# Altium PCB ESCV2.PcbDoc
Units mm, origin at the board's own origin, x right, y up, seen from the top; angles counter-clockwise.
Board outline 60 x 30 mm, 2 copper layers (L1, L2), stack 1.671 mm thick; 69 components, 45 nets, 192 pads, 35 vias.
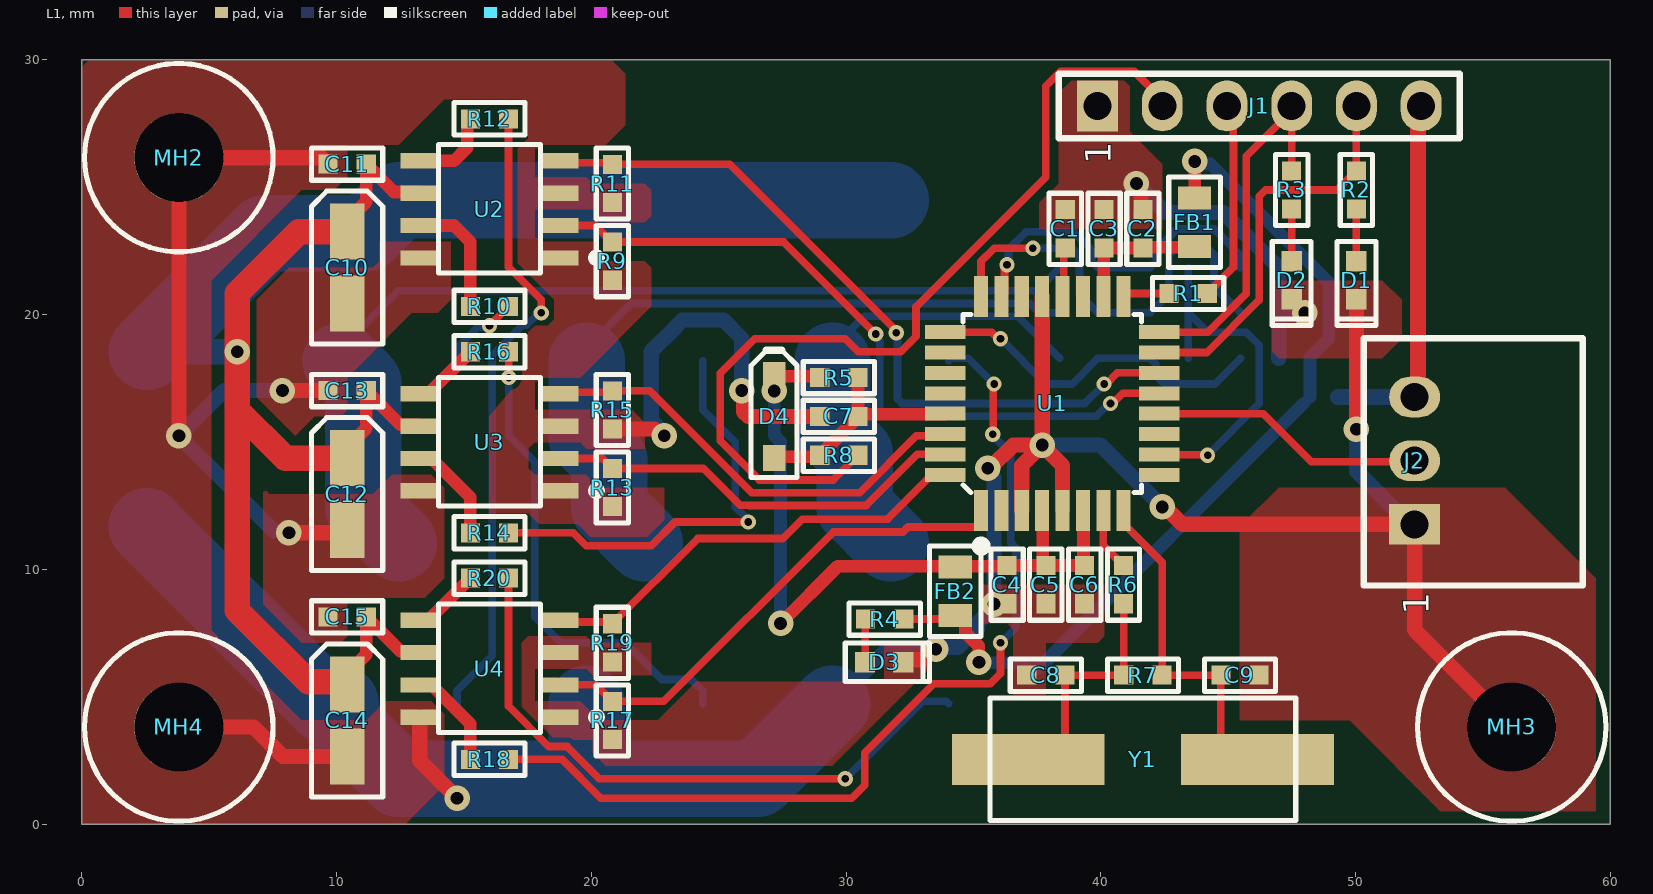
[diagram p0: L1 view]
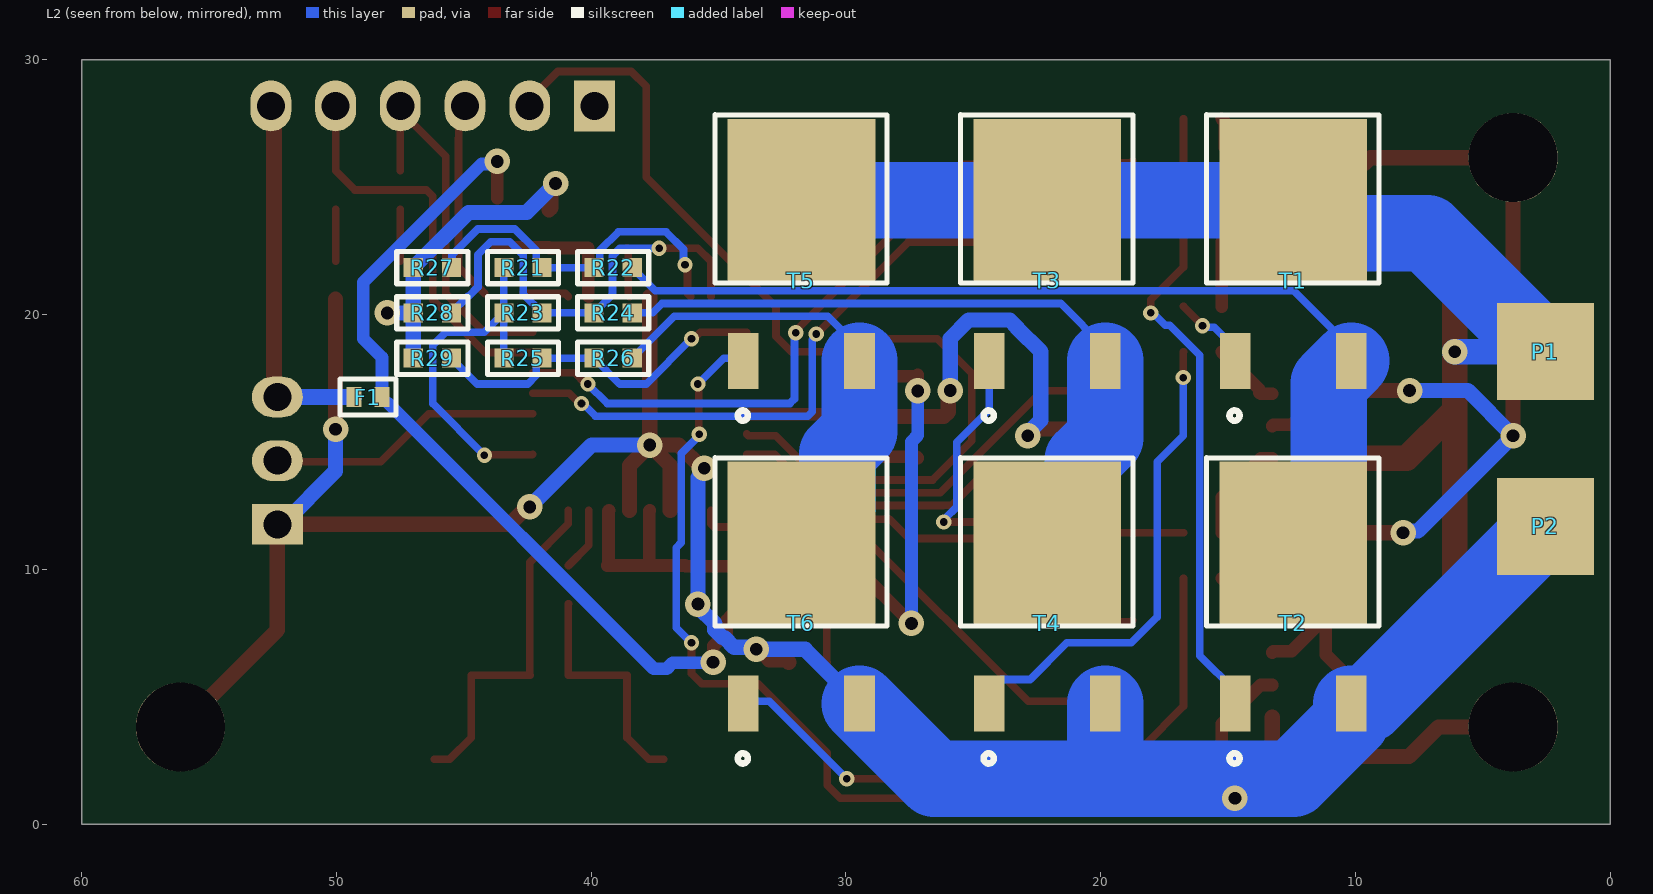
[diagram p1: L2 view, seen from below]
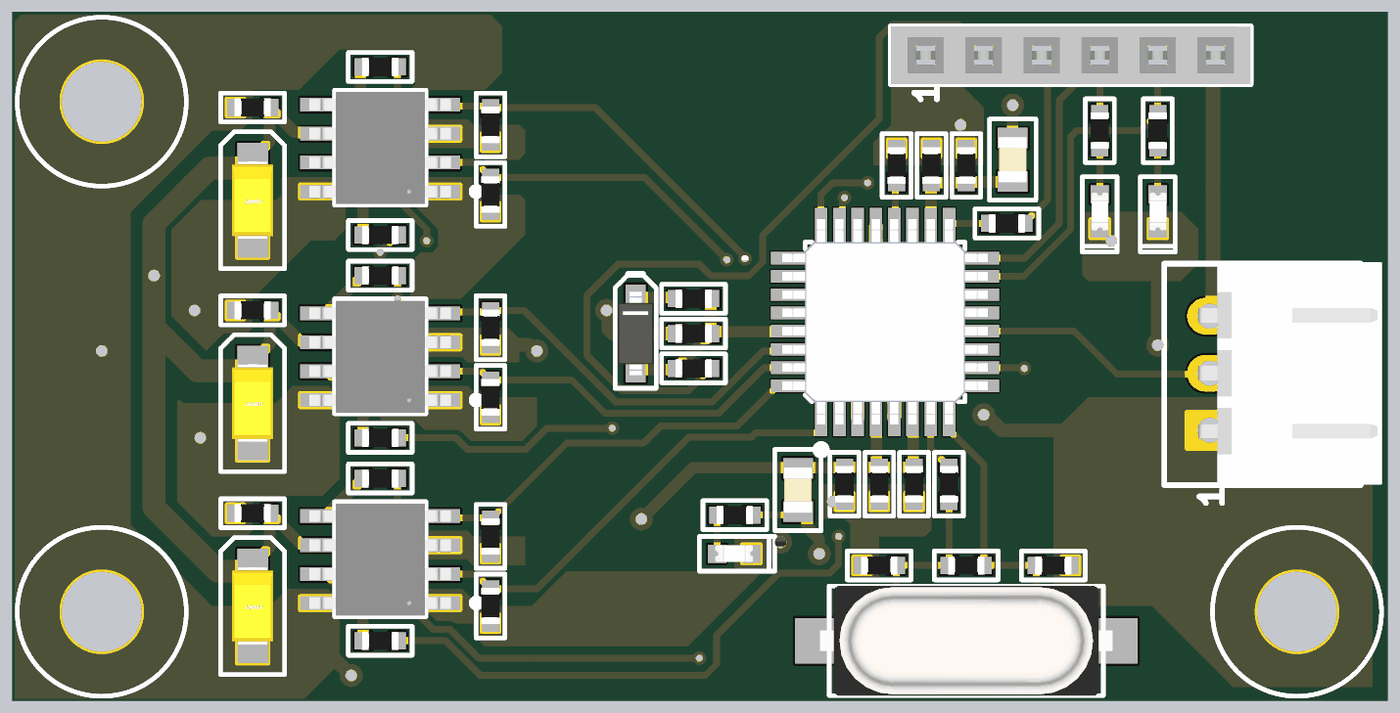
[diagram p2: 3D render of the assembled board from above, using the file's embedded part models]
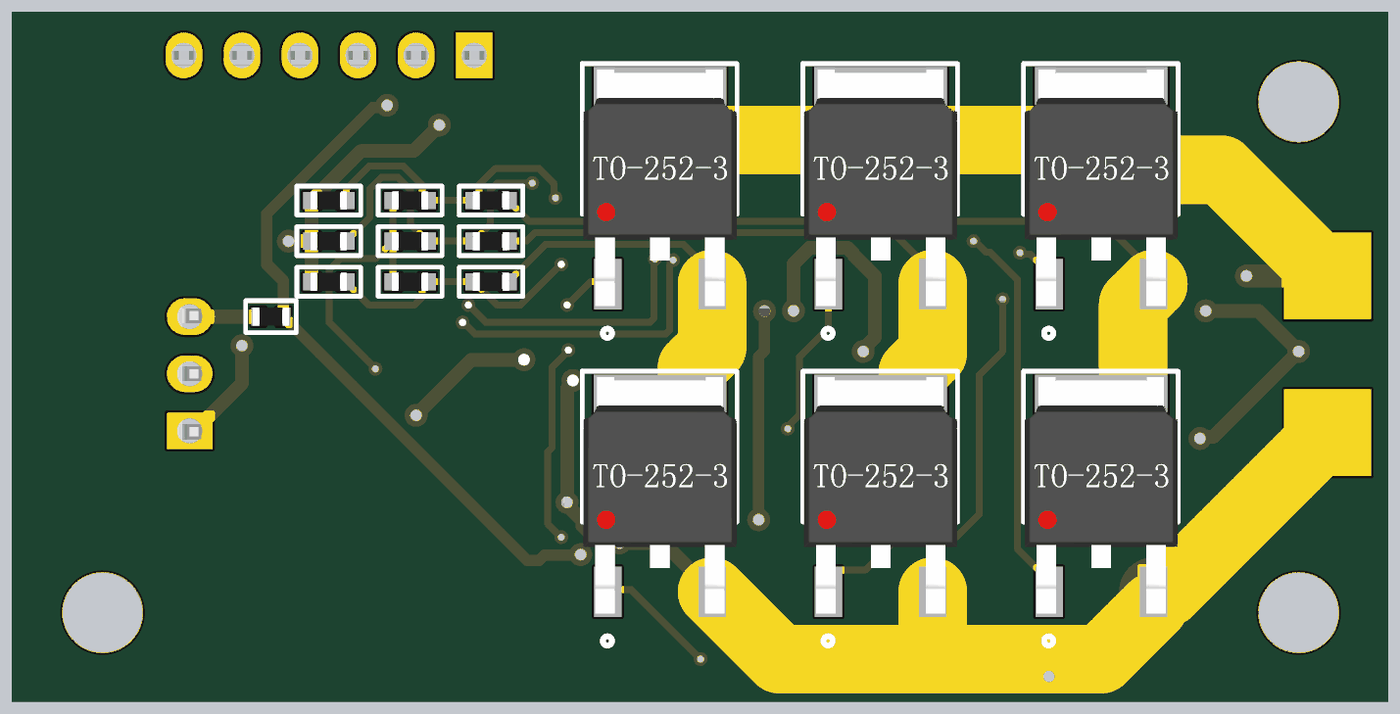
[diagram p3: 3D render of the assembled board from below, using the file's embedded part models]

## Layer stack, top to bottom
Top Solder: solder mask 0.0102, Solder Resist, Dk 3.5
L1: signal copper 0.0356
Dielectric 1: dielectric 1.6, FR-4, Dk 4.8
L2: signal copper 0.0356
Bottom Solder: solder mask 0.0102, Solder Resist, Dk 3.5

## Board outline
0,0 0,30 60,30 60,0

## Design rules (kind name [scope] priority, off if disabled: settings)
Clearance [All] p1: gap=0.2 ignorepadtopadclearanceinfootprint=FALSE
ComponentClearance [All] p1: gap=0.2 collisioncheckmode=3 verticalgap=0.2 showdistances=FALSE
HoleSize [All] p1: absolutevalues=TRUE maxlimit=10 minlimit=0.2 maxpercent=80.000 minpercent=20.000
HoleToHoleClearance [All] p1: gap=0.3 allowstackedmicrovias=TRUE
MinimumSolderMaskSliver [All] p1: minsoldermaskwidth=0.1
PolygonConnect [All] p1: connectstyle=Direct reliefconductorwidth=0.254 reliefentries=4 polygonreliefangle="90 Angle" airgapwidth=0.254
RoutingVias [All] p1: holewidth=0.3 width=0.6 viastyle="Through Hole" minholewidth=0.3 minwidth=0.6 maxholewidth=0.5 maxwidth=1
SilkToSilkClearance [All] p1: silktosilkclearance=0.1
SilkToSolderMaskClearance [IsPad] p1: minsilkscreentomaskgap=0 clearancetoexposedcopper=TRUE
SilkToSolderMaskClearance U3-ALL [IsPad] p2: minsilkscreentomaskgap=0.1 clearancetoexposedcopper=TRUE
SolderMaskExpansion [All] p1: expansion=0.1 istentingtop=FALSE
Width Width_POWER [InNet('+*') or InNet('GND') OR InNet('phase*')] p1: maxlimit=3 minlimit=0.3 preferedwidth=0.3
Width [All] p2: maxlimit=0.5 minlimit=0.3 preferedwidth=0.3
24 further rules are at their usual default settings.

## Classes and differential pairs
component class ESC2: C10 C11 C12 C13 C14 C15 J2 MH2 MH3 MH4 P1 P2 R9 R10 R11 R12 R13 R14 R15 R16 R17 R18 R19 R20 R21 R22 R23 R24 R25 R26 R27 R28 R29 T1 T2 T3 T4 T5 T6 U2 U3 U4
component class ESC1: C1 C2 C3 C4 C5 C6 C7 C8 C9 D1 D2 D3 D4 F1 FB1 FB2 J1 R1 R2 R3 R4 R5 R6 R7 R8 U1 Y1

## Components (designator, comment, footprint, x,y, rotation, side; value= is the part's Value field where it differs from the comment)
C1 "100nF" Z0603 38.608,23.368 r90 top
C2 "10uF" Z0603 41.656,23.368 r270 top
C3 "100nF" Z0603 40.132,23.368 r270 top
C4 "10uF" Z0603 36.322,9.398 r90 top
C5 "100nF" Z0603 37.846,9.398 r90 top
C6 "100nF" Z0603 39.37,9.398 r90 top
C7 "100nF" Z0603 29.718,16.002 r0 top
C8 "22pF" Z0603 37.846,5.842 r180 top
C9 "22pF" Z0603 45.466,5.842 r0 top
C10 "1uF" "1206 TANTAL CAP" 10.414,21.844 r270 top
C11 "100nF" Z0603 10.414,25.908 r180 top
C12 "1uF" "1206 TANTAL CAP" 10.414,12.954 r270 top
C13 "100nF" Z0603 10.414,17.018 r180 top
C14 "1uF" "1206 TANTAL CAP" 10.414,4.064 r270 top
C15 "100nF" Z0603 10.414,8.128 r180 top
D1 "GREEN" LED-0603 50.038,21.348 r90 top
D2 "BLUE" LED-0603 47.498,21.348 r90 top
D3 "RED" LED-0603 31.496,6.35 r180 top
D4 "SS0540_R1_00001" SOD-123 27.178,16.002 r270 top
F1 "FSMD075-0603RZ" F-0603 48.768,16.764 r180 bottom
FB1 "LCB2012-110Y-N" C0805 43.688,23.622 r270 top
FB2 "LCB2012-110Y-N" C0805 34.29,9.144 r90 top
J1 "HEADER-FEMALE-1X6-2.54mm" FEMALE-1X6-2.54MM 39.878,28.194 r90 top
J2 "2.50 mm" L-KLS1-XL4-2.50-03-R 52.324,14.264 r90 top
MH2 "MH_7.4MMC_3.2MMD" MH_7.4MMC_3.2MMD_NON_COPPER_NPLT 3.81,26.162 r0 top
MH3 "MH_7.4MMC_3.2MMD" MH_7.4MMC_3.2MMD_NON_COPPER_NPLT 56.134,3.81 r0 top
MH4 "MH_7.4MMC_3.2MMD" MH_7.4MMC_3.2MMD_NON_COPPER_NPLT 3.81,3.81 r0 top
P1 "PAD" SQARE_PAD 2.54,18.542 r180 bottom
P2 "PAD" SQARE_PAD 2.54,11.684 r180 bottom
R1 "22R" Z0603 43.434,20.828 r180 top
R2 "1K" Z0603 50.038,24.892 r90 top
R3 "1K" Z0603 47.498,24.892 r90 top
R4 "1K" Z0603 31.521,8.047 r0 top
R5 "10K" Z0603 29.718,17.526 r180 top
R6 "22R" Z0603 40.894,9.398 r90 top
R7 "1M" Z0603 41.656,5.842 r0 top
R8 "100R" Z0603 29.718,14.478 r180 top
R9 "4K7" Z0603 20.828,22.098 r90 top
R10 "100R" Z0603 16.002,20.32 r180 top
R11 "4K7" Z0603 20.828,25.146 r90 top
R12 "100R" Z0603 16.002,27.686 r180 top
R13 "4K7" Z0603 20.828,13.208 r90 top
R14 "100R" Z0603 16.002,11.43 r180 top
R15 "4K7" Z0603 20.828,16.256 r90 top
R16 "100R" Z0603 16.002,18.542 r180 top
R17 "4K7" Z0603 20.828,4.064 r90 top
R18 "100R" Z0603 16.002,2.54 r180 top
R19 "4K7" Z0603 20.828,7.112 r90 top
R20 "100R" Z0603 16.002,9.652 r180 top
R21 "33K" Z0603 42.684,21.844 r180 bottom
R22 "33K" Z0603 39.14,21.844 r180 bottom
R23 "33K" Z0603 42.684,20.066 r180 bottom
R24 "33K" Z0603 39.14,20.066 r180 bottom
R25 "33K" Z0603 42.684,18.288 r180 bottom
R26 "33K" Z0603 39.14,18.288 r180 bottom
R27 "10K" Z0603 46.24,21.844 r0 bottom
R28 "10K" Z0603 46.24,20.066 r0 bottom
R29 "10K" Z0603 46.24,18.288 r0 bottom
T1 "IRLR7843TRPBF" TO-252-3 12.446,21.336 r90 bottom
T2 "IRLR7843TRPBF" TO-252-3 12.446,7.874 r90 bottom
T3 "IRLR7843TRPBF" TO-252-3 22.098,21.336 r90 bottom
T4 "IRLR7843TRPBF" TO-252-3 22.098,7.874 r90 bottom
T5 "IRLR7843TRPBF" TO-252-3 31.75,21.336 r90 bottom
T6 "IRLR7843TRPBF" TO-252-3 31.75,7.874 r90 bottom
U1 "ATMEGA88PA-AU" TQFP32(ATMEGA88) 38.1,16.51 r90 top
U2 "TC427COA" SOIC-8 16.002,24.13 r180 top
U3 "TC427COA" SOIC-8 16.002,14.986 r180 top
U4 "TC427COA" SOIC-8 16.002,6.096 r180 top
Y1 "AS-16.000-16-SMD-TR" AS-16.000-16-SMD-TR 41.656,2.54 r0 top

## Footprints (in the part's own frame and the unit in brackets; to place one, negate y for a bottom-side part, rotate by r counter-clockwise, add the part's x,y. Pads: shape width x height; smd on the part's side, far side on the other; paste and mask are expansions set on the pad)
"1206 TANTAL CAP" [mm]
  rect 2.2x1.35 smd: 1(-1.41,0) 2(1.41,0)
  silkscreen extent -3,-1.4 3,1.4, body extent -1.7,-0.9 1.7,0.9, height 1.82
AS-16.000-16-SMD-TR [mm]
  rect 6x2 smd: 1(-4.5,0) 2(4.5,0)
  silkscreen extent -6,-2.4 6,2.4, body extent -6.4,-2.41 6.4,2.41, height 4.3
C0805 [mm]
  rect 0.9x1.3 smd: 1(-0.95,0) 2(0.95,0)
  silkscreen extent -1.78,-1.02 1.78,1.02, body extent -1,-0.63 1,0.63, height 0.7
F-0603 [mm]
  rect 0.6x0.8 smd: 1(-0.55,0) 2(0.55,0)
  silkscreen extent -1.1,-0.7 1.1,0.7, body extent -0.8,-0.4 0.8,0.4, height 0.46
FEMALE-1X6-2.54MM [mm]
  rect 2x1.6 hole 1.1: 1(0,0)
  oval 2x1.6 hole 1.1: 2(0,-2.54) 3(0,-5.08) 4(0,-7.62) 5(0,-10.16) 6(0,-12.7)
  silkscreen extent -1.27,-14.22 1.27,1.52, body extent -1.27,-14.22 1.27,1.52, height 8.8
L-KLS1-XL4-2.50-03-R [mm]
  rect 1.6x2 hole 1.1: 1(-2.5,0)
  oval 1.6x2 hole 1.1: 2(0,0) 3(2.5,0)
  silkscreen extent -4.9,-6.6 4.8,2, body extent -4.88,-7.53 4.88,0.5, height 5.85
LED-0603 [mm]
  rect 0.8x0.8 smd: 1(-0.75,0) 2(0.75,0)
  silkscreen extent -1.78,-0.76 1.52,0.76, body extent -0.82,-0.38 0.82,0.35, height 0.68
MH_7.4MMC_3.2MMD_NON_COPPER_NPLT [mm]
  round 3.5 hole 3.5: 1(0,0)
  silkscreen extent -3.7,-3.7 3.7,3.7
SOD-123 [mm]
  rect 1.02x0.88 smd: 1(-1.635,0) 2(1.635,0)
  silkscreen extent -2.6,-0.9 2.4,0.9, body extent -1.83,-0.77 1.83,0.77, height 1.46
SOIC-8 [mm]
  rect 1.52x0.6 smd: 1(-2.74,1.905) 2(-2.74,0.635) 3(-2.74,-0.635) 4(-2.74,-1.905) 5(2.74,-1.905) 6(2.74,-0.635) 7(2.74,0.635) 8(2.74,1.905)
  silkscreen extent -4.4,-2.54 2,2.5, body extent -3.1,-2.45 3.1,2.45, height 1.76
SQARE_PAD [mm]
  rect 3.81x3.81 smd paste-2539.97 mask+0.102: 1(0,0)
TO-252-3 [mm]
  rect 2.2x1.2 smd: 1(-3.15,2.28) 3(-3.15,-2.28)
  rect 6.4x5.8 smd: 2(3.15,0)
  silkscreen extent -5.5,-3.36 6.51,3.4, body extent -4.1,-3.35 6.25,3.35, height 2.41
TQFP32(ATMEGA88) [mm]
  rect 1.6x0.55 smd mask+0.06: 1(-4.2,2.8) 2(-4.2,2) 3(-4.2,1.2) 4(-4.2,0.4) 5(-4.2,-0.4) 6(-4.2,-1.2) 7(-4.2,-2) 8(-4.2,-2.8) 17(4.2,-2.8) 18(4.2,-2) 19(4.2,-1.2) 20(4.2,-0.4) 21(4.2,0.4) 22(4.2,1.2) 23(4.2,2) 24(4.2,2.8)
  rect 0.55x1.6 smd mask+0.06: 9(-2.8,-4.2) 10(-2,-4.2) 11(-1.2,-4.2) 12(-0.4,-4.2) 13(0.4,-4.2) 14(1.2,-4.2) 15(2,-4.2) 16(2.8,-4.2) 25(2.8,4.2) 26(2,4.2) 27(1.2,4.2) 28(0.4,4.2) 29(-0.4,4.2) 30(-1.2,4.2) 31(-2,4.2) 32(-2.8,4.2)
  silkscreen extent -5.8,-3.5 3.5,3.5, body extent -4.5,-4.5 4.5,4.5, height 1.18
Z0603 [mm]
  rect 0.75x0.75 smd: 1(-0.75,0) 2(0.75,0)
  silkscreen extent -1.4,-0.64 1.4,0.64, body extent -0.8,-0.4 0.8,0.4, height 0.46

## Part data
C1 C3 C5 C6 C7 C11 C13 C15: library part CL10B104KB8NNNC, "Multi Layer Ceramic Capacitor (MLCC) / Cap Ceramic 0.1uF 50V X7R 10% Pad SMD 0603 125¡ãC T/R", Case Code (Metric)=1608, Case Code (Imperial)=0603, Dielectric=X7R, Manufacturer=Samsung, Max Operating Temperature=125°C, Min Operating Temperature=-55°C, Package Quantity=1, Supplier Part Number 1=7665443, Tolerance=10%, Voltage=50V, Capacitance=100nF, Case/Package=0603, Category="Ceramic Capacitors", ComponentLink4Description=OZDISAN_LINK, ComponentLink4URL=https://ozdisan.com/pasif-komponentler/kondansatorler/smt-smd-ve-mlcc-kondansatorler/CL10B104KB8NNNC, Construction=Flat, Contact Plating=Tin, Depth=0.8mm, Height=0.8mm, Lead Free="Lead Free", Length=1.6mm, Manufacturer Part Number=CL10B104KB8NNNC, Material=Ceramic, Mount="Surface Mount", OZDISAN_PRICE="0.05 TRY", Packaging="Tape and Reel", Pricing 1="4000=0,00800, 8000=0,00800, 16000=0,00800, 24000=0,00700, 40000=0,00600, 4000=0,00600, 8000=0,00600, 16000=0,00600, 24000=0,00500, 40000=0,00400 (USD)", Radiation Hardening=No, RoHS=Yes, RoHS Compliant=Yes, Series=CL, Stock 1=17024000, Supplier 1=RSComponents, Thickness=0.035inch, Voltage Rating=50V, Voltage Rating (DC)=50V, Width=0.031inch
C2 C4: library part CL10A106KP8NNNC, "Cap Ceramic 10uF 10V X5R 10% Pad SMD 0603 85C T/R", Case Code (Metric)=1608, Case Code (Imperial)=0603, Dielectric=X5R, Manufacturer=Samsung, Max Operating Temperature=85°C, Min Operating Temperature=-55°C, Package Quantity=1, Supplier Part Number 1=5232459, Tolerance=10%, Voltage Rating=10V, Capacitance=10uF, Case/Package=0603, Category="Ceramic Capacitors", ComponentLink4Description=OZDISAN_LINK, ComponentLink4URL=https://ozdisan.com/Product/Detail/350863/CL10A106KP8NNNC, Construction=Flat, Contact Plating=Tin, Depth=0.8mm, Height=0.8mm, Lead Free="Lead Free", Length=1.6mm, Manufacturer Part Number=CL10A106KP8NNNC, Material=Ceramic, Mount="Surface Mount", OZDISAN_PRICE="0.60 TRY", Packaging="Tape and Reel", Pricing 1="4000=0,03170, 8000=0,02840, 12000=0,02830, 20000=0,02810, 40000=0,02790 (USD)", Radiation Hardening=No, RoHS=Yes, RoHS Compliant=Yes, Series=CL, Stock 1=202000, Supplier 1="Future Electronics", Thickness=0.035inch, Voltage Rating (DC)=10V, Width=0.031inch
C8 C9: library part CL10C220JB8NNNC, "Ceramic capacitor SMD-0603 22pF /50V NP0# J +-5%, Samsung, RoHS", Case Code (Metric)=1608, Case Code (Imperial)=0603, Dielectric=C0G, Manufacturer=Samsung, Max Operating Temperature=125°C, Min Operating Temperature=-55°C, Package Quantity=1, Supplier Part Number 1=7665033, Temperature Coefficient=300ppm/°C, Tolerance=5%, Voltage=50V, Capacitance=22pF, Case/Package=0603, Category="Ceramic Capacitors", ComponentLink5Description=OZDISAN_LINK, ComponentLink5URL=https://ozdisan.com/pasif-komponentler/kondansatorler/smt-smd-ve-mlcc-kondansatorler/CL10C220JB8NNNC, Contact Plating=Tin, Depth=0.8mm, Height=0.8mm, Lead Free="Lead Free", Length=0.063inch, Manufacturer Part Number=CL10C220JB8NNNC, Material=Ceramic, Mount="Surface Mount", OZDISAN_PRICE="0.09 TRY", Packaging="Tape and Reel", Pricing 1="4000=0,01100, 8000=0,01100, 16000=0,01000, 24000=0,00800, 40000=0,00700 (USD)", Radiation Hardening=No, RoHS=Yes, RoHS Compliant=Yes, Series=CL, Stock 1=1, Supplier 1=RSComponents, Thickness=0.035inch, Voltage Rating=50V, Voltage Rating (DC)=50V, Width=0.031inch
C10 C12 C14: library part T491A105K035AT, "Cap Tant Solid 1uF 35V A CASE 10% (3.2 X 1.6 X 1.6mm) SMD 3216-18 7.5 Ohm 125 C T/R", Case Code (Metric)=3216, Case Code (Imperial)=1206, Dielectric Material=Tantalum, ESR (Equivalent Series Resistance)=7.5R, Leakage Current=500nA, Manufacturer=KEMET, Max Operating Temperature=125°C, Min Operating Temperature=-55°C, Package Quantity=1, Ripple Current=100mA, Supplier Part Number 1=399-8265-1-ND, Tolerance=20%, Voltage=25V, Voltage Rating=35V, Capacitance=1uF, Case/Package=1206, Category="Tantalum Capacitors", ComponentLink12Description=OZDISAN_LINK, ComponentLink12URL=https://ozdisan.com/pasif-komponentler/kondansatorler/tantal-kondansatorler/T491A105K035AT, Depth=1.6mm, Dissipation Factor=4%, Failure Rate=0.001%, Features="General Purpose", Height=1.6mm, Height - Seated (Max)=0.071inch, Lead Free="Lead Free", Length=3.2mm, Life (Hours)=2000Hour, Manufacturer Part Number=T491A105K035AT, Mount="Surface Mount,PCB", Number of Pins=2, OZDISAN_PRICE="1.78 TRY", Packaging="Tape and Reel", Polarity=Polar, Pricing 1="1=0,53000, 10=0,37100, 50=0,26000, 100=0,22290, 500=0,16716, 1000=0,14115 (USD)", Radiation Hardening=No, REACH SVHC="No SVHC", RoHS=Yes, RoHS Compliant=Yes, Stock 1=48, Supplier 1=Digi-Key, Termination=SMD/SMT, Voltage Rating (DC)=35V, Width=1.6mm
D1: library part HL-PST-1608U51GC, Case-Package=0603, ComponentLink1Description=OZDISAN_LINK, ComponentLink1URL=https://ozdisan.com/Product/Detail/471660/HL-PST-1608U51GC, OZDISAN_PRICE="0.22 TRY"
D2: library part 27-21/B7C-ZR1S1N/3C, Case-Package=0603, ComponentLink1Description=OZDISAN_LINK, ComponentLink1URL=https://ozdisan.com/led-ve-aydinlatma-cozumleri/led-komponentler/sinyal-ledler-renkli/27-21B7C-ZR1S1N3C, OZDISAN_PRICE="1,46 TRY"
D3: library part LTST-C190KRKT, "0603 red led alingap 631nm-639nm water clear 18-180mcd 130d", Case Code (Metric)=1608, Case Code (Imperial)=0603, Color=Red, Forward Current=30mA, Forward Voltage=2.4V, Lens Color=Colorless, Manufacturer="Vishay Lite-On", Max Operating Temperature=85°C, Min Operating Temperature=-55°C, Package Quantity=1, Power Dissipation=75mW, Reverse Voltage=5V, Supplier Part Number 1=160-1436-1-ND, Test Current=20mA, Case/Package=0603, Category=LEDs, ComponentLink10Description=OZDISAN_LINK, ComponentLink10URL=https://ozdisan.com/led-ve-aydinlatma-cozumleri/led-komponentler/sinyal-ledler-renkli/LTST-C190KRKT, Depth=0.8mm, Dominant Wavelength=631nm, Height=0.8mm, Lead Free="Lead Free", Length=1.6mm, Lens Style=Diffused,Colorless,Clear,Rectangular, Lens Transparency=Clear, Luminous Intensity=54mcd, Manufacturer Part Number=LTST-C190KRKT, Mount="Surface Mount", Number of Elements=1, Number of LEDs=1, Number of Pins=2, OZDISAN_PRICE="0.38 TRY", Packaging="Tape and Reel", Power Rating=75mW, Pricing 1="1=0,24000, 10=0,13200, 100=0,06110, 500=0,05640, 1000=0,04418, 2000=0,04324 (USD)", Radiation Hardening=No, RoHS=Yes, RoHS Compliant=Yes, Stock 1=874288, Supplier 1=Digi-Key, Viewing Angle=130°, Wavelength=639nm, Width=0.8mm, Illumination Color=Red
D4: "Diode Schottky 40V 0.5A 2-Pin SOD-123 T/R", Manufacturer="Pan Jit", Max Operating Temperature=125°C, Max Repetitive Reverse Voltage (Vrrm)=40V, Min Operating Temperature=-55°C, Peak Non-Repetitive Surge Current=5.5A, Supplier Part Number 1=3757-SS0540_R1_00001CT-ND, Category="Rectifier Diodes", ComponentLink3Description=OZDISAN_LINK, ComponentLink3URL=https://ozdisan.com/guc-yari-iletkenleri/diyotlar-modul-diyotlar-ve-dogrultucular/schottky-diyotlar/SS0540R100001, Element Configuration=Single, Manufacturer Part Number=SS0540_R1_00001, Mount="Surface Mount", OZDISAN_PRICE="0.55 TRY", Pricing 1="1=0,29000, 10=0,23400, 100=0,12410, 500=0,08168, 1000=0,05554 (USD)", Radiation Hardening=No, RoHS=Yes, RoHS Compliant=Yes, Stock 1=6025, Supplier 1=Digi-Key
F1: Case-Package=0603, Current Rating=0.75, Max Voltage=6V, ComponentLink1Description=OZDISAN_LINK, ComponentLink1URL=https://ozdisan.com/guc-yari-iletkenleri/devre-koruyucu-komponentler/ptc-sigortalar/FSMD075-0603RZ, OZDISAN_PRICE="3.16 TRY"
FB1 FB2: Case-Package=0603, ComponentLink1Description=OZDISAN_LINK, ComponentLink1URL=https://ozdisan.com/pasif-komponentler/induktorler/bead-feritler/LCB2012-110Y-N, OZDISAN_PRICE="0,22 TRY"
J1: library part PPPC061LFBN-RC, "CONN HDR 6POS 0.1 GOLD PCB", Color=Black, Manufacturer=Sullins, Package Quantity=1000, Supplier Part Number 1=S7039-ND, Category=Connectors, ComponentLink1Description=https://media.digikey.com/pdf/Data%20Sheets/Sullins%20PDFs/Female_Headers.100_DS.pdf?src-supplier=Digi-Key, ComponentLink1URL=https://media.digikey.com/pdf/Data%20Sheets/Sullins%20PDFs/Female_Headers.100_DS.pdf?src-supplier=Digi-Key, Connector Type=Header,Socket, Contact Material=Bronze, Contact Plating=Gold, Height=8.5mm, Housing Material=Plastic, Lead Free="Lead Free", Length=15.7mm, Manufacturer Part Number=PPPC061LFBN-RC, Mount="Through Hole", Number of Positions=6, Number of Rows=1, Packaging=Bulk, Pitch=0.1inch, Pricing 1="1=0,53000, 10=0,46500, 80=0,38300, 440=0,33300, 1000=0,27472, 5000=0,24142, 10000=0,24050 (USD)", RoHS=Yes, Stock 1=33601, Supplier 1=Digi-Key, Termination=Solder, Width=2.5mm
J2: library part L-KLS1-XL4-2.50-03-R, ComponentLink1Description=OZDISAN_LINK, ComponentLink1URL=https://ozdisan.com/konnektor-ve-baglanti-elemanlari/konnektor-cesitleri/pcb-konnektorler/L-KLS1-XL4-2-50-03-R, OZDISAN_PRICE="0,27 TRY"
MH2 MH3 MH4: library part MH_7.4MMNC_3.2MMD, "Mounting Hole 7.4 mm Diameter (Non Copper), 3.2 mm Drill NPTH"
P1 P2: library part SQARE_PAD
R1 R6: library part MC0603SAF220JT5E, "MULTICOMP         MC0603SAF220JT5E            RESISTOR, THICK FILM, 22OHM, 100mW, 1%", Case Code (Metric)=1608, Case Code (Imperial)=0603, Manufacturer=Multicomp, Power Rating=100mW, Resistance Tolerance=1%, Resistor Type="Thick Film", Supplier Part Number 1=79M5934, Temperature Coefficient=100ppm/°C, Voltage Rating=75V, Case/Package=0603, Category=Resistors, ComponentLink2Description=OZDISAN_LINK, ComponentLink2URL=https://ozdisan.com/pasif-komponentler/direncler/smt-smd-ve-cip-direncler/0603SAF220JT5E, Manufacturer Part Number=MC0603SAF220JT5E, Number of Pins=2, OZDISAN_PRICE="0.02 TRY", Packaging="Cut Tape", REACH SVHC=Unknown, Resistance=22R, RoHS=Yes, RoHS Compliant=Yes, Supplier 1=Newark, Tolerance=1%, Voltage Rating (DC)=75V
R2 R3 R4: library part MC0603SAF1001T5E, "MULTICOMP - MC0603SAF1001T5E - THICK FILM RESISTOR, 1KOHM, 100mW, 1%", Case Code (Metric)=1608, Case Code (Imperial)=0603, Manufacturer=Multicomp, Power Rating=100mW, Resistance=1kR, Resistance Tolerance=1%, Resistor Type="Thick Film", Supplier Part Number 1=1632391, Temperature Coefficient=100ppm/°C, Voltage Rating=75V, Case/Package=0603, Category=Resistors, ComponentLink2Description=OZDISAN_LINK, ComponentLink2URL=https://ozdisan.com/pasif-komponentler/direncler/smt-smd-ve-cip-direncler/0603SAF1001T5E, Manufacturer Part Number=MC0603SAF1001T5E, OZDISAN_PRICE="0.02 TRY", Packaging="Cut Tape", Pricing 1="1=0,00890, 10=0,00810, 100=0,00730, 1000=0,00390 (GBP)", REACH SVHC=Unknown, RoHS=Yes, RoHS Compliant=Yes, Stock 1=340, Supplier 1=Farnell, Tolerance=1%, Voltage Rating (DC)=75V
R5 R27 R28 R29: library part CQ03SAF1002T5E, Case-Package=0603, ComponentLink1Description=OZDISAN_LINK, ComponentLink1URL=https://ozdisan.com/pasif-komponentler/direncler/smt-smd-ve-cip-direncler/CQ03SAF1002T5E, OZDISAN_PRICE="0.03 TRY"
R7: library part MC0603SAF1004T5E, "Res General Purpose Thick Film 0603 1M Ohm 1% 1/10W ±100ppm/°C Molded T/R", Case Code (Metric)=1608, Case Code (Imperial)=0603, Manufacturer=Multicomp, Power Rating=100mW, Resistance=1MR, Resistance Tolerance=1%, Resistor Type="Thick Film", Supplier Part Number 1=1631320, Temperature Coefficient=100ppm/°C, Voltage Rating=75V, Case/Package=0603, Category=Uncategorized, ComponentLink1Description=https://datasheet.ciiva.com/7919/ta-677-7919113.pdf?src-supplier=Element14, ComponentLink1URL=https://datasheet.ciiva.com/7919/ta-677-7919113.pdf?src-supplier=Element14, ComponentLink2Description=ÖZDISAN_LINK, ComponentLink2URL=https://ozdisan.com/pasif-komponentler/direncler/smt-smd-ve-cip-direncler/0603SAF1004T5E, Manufacturer Part Number=MC0603SAF1004T5E, OZDISAN_PRICE="0.02 TRY", Packaging="Cut Tape", Pricing 1="1=0,00910, 10=0,00830, 100=0,00740, 1000=0,00400 (GBP)", REACH SVHC=Unknown, RoHS=Yes, RoHS Compliant=Yes, Stock 1=15998, Supplier 1=Farnell, Tolerance=1%, Voltage Rating (DC)=75V
R8 R10 R12 R14 R16 R18 R20: library part 0603SAJ0101T5E, Case-Package=0603, ComponentLink1Description=OZDISAN_LINK, ComponentLink1URL=https://ozdisan.com/pasif-komponentler/direncler/smt-smd-ve-cip-direncler/0603SAJ0101T5E, OZDISAN_PRICE="0.02 TRY"
R9 R11 R13 R15 R17 R19: library part MC0603SAF4701T5E, "RES, THICK FILM, 4K7, 1%, 0.1W, 0603; Resistance: 4.7kohm; Resistance Tolerance: ± 1%; Power Rating: 100mW; Resistor...", Case Code (Metric)=1608, Case Code (Imperial)=0603, Manufacturer=Multicomp, Power Rating=100mW, Resistance=4.7kR, Resistance Tolerance=1%, Resistor Type="Thick Film", Supplier Part Number 1=1632439, Temperature Coefficient=100ppm/°C, Voltage Rating=75V, Case/Package=0603, Category=Uncategorized, ComponentLink2Description=OZDISAN_LINK, ComponentLink2URL=https://ozdisan.com/pasif-komponentler/direncler/smt-smd-ve-cip-direncler/0603SAF4701T5E, Manufacturer Part Number=MC0603SAF4701T5E, Number of Pins=2, OZDISAN_PRICE="0.02 TRY", Packaging="Cut Tape", Pricing 1="1=0,00890, 10=0,00810, 100=0,00730, 1000=0,00400 (GBP)", REACH SVHC=Unknown, RoHS=Yes, RoHS Compliant=Yes, Supplier 1=Farnell, Tolerance=1%, Voltage Rating (DC)=75V
R21 R22 R23 R24 R25 R26: library part RI0603L3302FT, Case-Package=0603, ComponentLink1Description=OZDISAN_LINK, ComponentLink1URL=https://ozdisan.com/pasif-komponentler/direncler/smt-smd-ve-cip-direncler/TC0325B3302T5C, OZDISAN_PRICE="0.09 TRY"
T1 T2 T3 T4 T5 T6: "MOSFET, 30V, 161A, 3.3 mOhm, 34 nC Qg, Logic Level, D-Pak", Case/Package=DPAK, Continuous Drain Current (ID)=161A, Drain to Source Breakdown Voltage=30V, Drain to Source Resistance=3.3mR, Drain-source On Resistance-Max=3.3MR, Gate to Source Voltage (Vgs)=20V, Manufacturer="International Rectifier", Max Operating Temperature=175°C, Max Power Dissipation=140W, Min Operating Temperature=-55°C, Package Quantity=1, Supplier Part Number 1=70017418, Input Capacitance=4.38nF, Category=MOSFETs, ComponentLink1Description=OZDISAN_LINK, ComponentLink1URL=https://www.ozdisan.com/guc-yari-iletkenleri/mosfetler/mosfet-discrete/IRLR7843TRPBF, Current Rating=161A, Drain to Source Voltage (Vdss)=30V, Element Configuration=Single, Fall Time=19ns, Height=2.39mm, Lead Free="Lead Free", Length=6.73mm, Manufacturer Part Number=IRLR7843TRPBF, Mount="Surface Mount", Nominal Vgs=2.3V, Number of Elements=1, Number of Pins=3, On-State Resistance=3.3MR, OZDISAN_PRICE="14,41 TRY", Packaging="Cut Tape", Power Dissipation=140W, Radiation Hardening=No, Rds On Max=3.3mR, REACH SVHC="No SVHC", Rise Time=42ns, RoHS=Yes, RoHS Compliant=Yes, Series=HEXFET®, Supplier 1="Allied Electronics", Turn-Off Delay Time=34ns, Turn-On Delay Time=25ns, Voltage Rating (DC)=30V, Width=6.22mm
U1: "MCU 8-bit ATmega AVR RISC 8KB Flash 2.5V/3.3V/5V 32-Pin TQFP", Case/Package=A, Frequency=20MHz, Manufacturer="Microchip / Atmel", Max Operating Temperature=85°C, Max Supply Voltage=5.5V, Min Operating Temperature=-40°C, Min Supply Voltage=1.8V, Package Quantity=250, Voltage=5V, Category=Microcontrollers, ComponentLink4Description=OZDISAN_LINK, ComponentLink4URL=https://ozdisan.com/entegre-devreler-ics/embedded-entegreler/mikroislemciler/ATMEGA88PA-AU, Contact Plating=Tin,Matte, Core Architecture=AVR, Data Bus Width=8b, Density=8KB, Height=1.05mm, Lead Free="Lead Free", Length=7mm, Manufacturer Part Number=ATMEGA88PA-AU, Max Frequency=20MHz, Memory Size=8KB, Memory Type=FLASH, Mount="Surface Mount", Number of ADC Channels=8, Number of Pins=32, Number of Programmable I/O=23, Number of PWM Channels=6, Number of SPI Channels=1, Number of Timers/Counters=3, Number of I2C Channels=1, Number of I/Os=23, Oscillator Type=Internal, OZDISAN_PRICE="33,63 TRY", Packaging=Tray, Peripherals="Brown-out Detect/Reset,POR,PWM,WDT", Radiation Hardening=No, RAM Size=1KB, REACH SVHC="No SVHC", RoHS=Yes, Series="AVR® ATmega", Supplier 1="Arrow Electronics", Supplier Part Number 1=ATMEGA88PA-AU, Termination=SMD/SMT, Watchdog Timer=Yes, Width=7mm, Interface=SPI,UART,I2C,USART,2-Wire
U2 U3 U4: "IC MOSFET DVR 1.5A DUAL HS 8SOIC", Case/Package=SOIC, Manufacturer=Microchip, Max Operating Temperature=70°C, Max Output Current=1.5A, Max Power Dissipation=470mW, Max Supply Current=8mA, Max Supply Voltage=18V, Min Operating Temperature=0°C, Min Supply Voltage=4.5V, Operating Supply Voltage=16V, Package Quantity=100, Supplier Part Number 1=TC427COA-ND, Category="Gate Drivers", ComponentLink5Description=OZDISAN_LINK, ComponentLink5URL=https://ozdisan.com/entegre-devreler-ics/guc-entegreleri/guc-surucu-entegreleri/TC427COA, Fall Time=30ns, Height=1.42mm, Lead Free="Lead Free", Length=4.9mm, Manufacturer Part Number=TC427COA, Mount="Surface Mount", Nominal Supply Current=8mA, Number of Drivers=2, Number of Outputs=2, Number of Pins=8, Output Impedance=6R, OZDISAN_PRICE="20,56 TRY", Packaging=Rail/Tube, Power Dissipation=470mW, Pricing 1="1=1,45000, 25=1,19800, 100=1,08120 (USD)", Propagation Delay=75ns, Radiation Hardening=No, REACH SVHC="No SVHC", Rise Time=30ns, RoHS=Yes, RoHS Compliant=Yes, Series=-, Stock 1=562, Supplier 1=Digi-Key, Supply Current=8mA, Turn-On Delay Time=75ns, Width=3.91mm
Y1: "AS-SMD Series 16 MHz ±30 ppm 16pF -20°C TO +70°C SMT Microprocessor Crystal", Capacitance=1.6E-11F, Frequency=16MHz, Frequency Tolerance=30ppm, Load Capacitance=16pF, Manufacturer="Raltron Electronics", Max Operating Temperature=70°C, Min Operating Temperature=-20°C, Supplier Part Number 1=5574900, ComponentLink2Description=OZDISAN_LINK, ComponentLink2URL=https://ozdisan.com/Product/Detail/40446/AS-16-000-16-SMD-TR, Lead Free="Lead Free", Manufacturer Part Number=AS-16.000-16-SMD-TR, OZDISAN_PRICE="1.95 TRY", Pricing 1="1000=0,12700 (USD)", RoHS=Yes, Supplier 1="Future Electronics"

## Via types
v1: diameter 1, hole 0.5, L1 to L2, tented both sides, 19 vias
v2: diameter 0.6, hole 0.3, L1 to L2, tented both sides, 16 vias

## Nets (pads, with @x,y where several pads share a name; then routed paths per layer and width w, separated by ;. In a path a pad name is that pad's centre, name@x,y a point inside that pad or via, vN(x,y) a via of type N, cw(c..) or ccw(c..) an arc to the next point about the centre after c; other vN are vias at no path point)
+5V: F1.1 J1.6 J2.3 | length 14.5
  L1 w0.635: J2.3 52.451,16.891 52.451,28.067 J1.6
  L2 w0.635: F1.1 J2.3
+5VCC: F1.2 FB1.1 FB2.1 R4.2 | length 35.2
  L1 w0.3: R4.2 34.143,8.047 FB2.1
  L1 w0.5: R4.2 R4.2@32.345,8.12 ; FB2.1 34.49,8.194 34.69,7.994 34.69,7.511 35.21,6.991 35.21,6.358 v1(35.218,6.35) ; FB1.1 v1(43.688,26.011)
  L2 w0.5: v1(35.218,6.35) 35.24,6.328 36.806,6.328 37.038,6.096 37.55,6.096 F1.2@47.968,16.514 ; v1(43.688,26.011) 43.784,25.916 44.305,25.916 48.956,21.264 48.956,19.056 48.218,18.318 F1.2
+AREF: C1.1 U1.20 | length 2
  L1 w0.3: U1.20 38.554,20.764 38.554,22.564 C1.1
+AVCC: C2.2 C3.2 FB1.2 U1.18 | length 5.5
  L1 w0.5: U1.18 40.116,20.726 40.116,22.602 C3.2 C2.2 41.683,22.645 43.661,22.645 FB1.2
+VCC: C4.2 C5.2 C6.2 D4.1 FB2.2 R5.2 U1.4 U1.6 | length 28.9
  L1 w0.5: v1(27.178,17.002) D4.1 ; D4.1@27.234,17.581 28.912,17.581 R5.2 ; v1(27.432,7.874) 29.679,10.121 36.295,10.121 C4.2 C5.2 ; U1.4 37.725,12.285 37.725,10.269 C5.2 ; U1.6 39.325,12.285 39.325,10.193 C6.2 C5.2
  L2 w0.5: v1(27.178,17.002) 27.182,16.998 27.182,15.26 27.432,15.01 v1(27.432,7.874)
+VMN: C10.1 C11.1 C12.1 C13.1 C14.1 C15.1 P1.1 T1.2 T3.2 T5.2 U2.6 U3.6 U4.6 | length 80.4
  L1 w0.5: C14.1 10.414,5.899 11.164,6.649 C15.1 12.511,6.781 13.212,6.781 U4.6 ; C12.1 10.414,14.789 11.164,15.539 C13.1 12.511,15.671 13.212,15.671 U3.6 ; C10.1 10.414,23.679 11.164,24.429 C11.1 12.257,24.815 13.212,24.815 U2.6
  L1 w1: C14.1 10.3,5.588 8.89,5.588 6.096,8.382 6.096,16.256 ; C12.1 7.988,14.364 6.096,16.256 ; C10.1 8.522,23.254 6.096,20.828 v1(6.096,18.542) 6.096,16.256
  L2 w1: P1.1 v1(6.096,18.542)
  L2 w3: P1.1 7.188,23.19 11.15,23.19 T1.2 T3.2 T5.2
A0: R21.2 R22.1 R27.1 U1.23 | length 14
  L1 w0.3: U1.23 36.225,20.835 36.225,21.778 36.322,21.875 v2(36.322,21.956)
  L2 w0.3: v2(36.322,21.956) 36.379,22.013 36.379,22.567 37.069,23.256 38.93,23.256 39.665,22.521 39.665,22.069 R22.1 R21.2 42.159,22.069 42.159,22.521 42.998,23.36 44.458,23.36 45.466,22.352 45.466,21.868 R27.1
A1: R23.2 R24.1 R28.1 U1.24 | length 17.7
  L1 w0.3: U1.24@35.315,20.725 U1.24 35.3,22.092 35.814,22.606 v2(37.338,22.606)
  L2 w0.3: v2(37.338,22.606) 38.873,22.606 39.165,22.314 39.165,20.791 R24.1 R23.2 42.672,20.804 42.672,22.327 43.205,22.86 43.942,22.86 44.45,22.352 44.45,21.082 44.817,20.715 44.841,20.715 R28.1
A2: R25.2 R26.1 R29.1 U1.25 | length 14
  L1 w0.3: U1.25 35.727,19.31 35.987,19.05 v2(36.068,19.05)
  L2 w0.3: v2(36.068,19.05) 37.846,17.272 38.874,17.272 R26.1 R25.2 42.159,18.063 42.159,17.611 42.498,17.272 44.474,17.272 R29.1
AH: R9.2 U1.13 U2.2 | length 28.7
  L1 w0.3: U2.2 20.181,23.495 R9.2 27.56,22.848 v2(31.172,19.236) ; v2(40.386,16.51) 40.467,16.51 40.867,16.91 U1.13
  L2 w0.3: v2(31.172,19.236) 31.172,19.155 31.32,19.007 31.32,16.178 31.496,16.002 39.833,16.002 40.341,16.51 v2(40.386,16.51)
AIN0: R21.1 R23.1 R25.1 U1.10 | length 13.9
  L1 w0.3: U1.10 42.316,14.494 44.18,14.494 v2(44.196,14.478)
  L2 w0.3: R25.1 R23.1 ; R21.1 R23.1 ; v2(44.196,14.478) 46.228,16.51 46.228,18.795 45.719,19.304 44.196,19.304 R23.1
AL: R11.2 U1.14 U2.4 | length 29.5
  L1 w0.3: U2.4 18.811,25.966 20.759,25.966 R11.2 25.432,25.896 31.971,19.357 v2(31.971,19.282) ; v2(40.132,17.272) 40.213,17.272 40.651,17.71 U1.14
  L2 w0.3: v2(31.971,19.282) 32.024,19.229 32.024,16.686 32.2,16.51 39.37,16.51 v2(40.132,17.272)
BH: R13.2 U1.31 U3.2 | length 16.8
  L1 w0.3: U3.2 20.435,14.351 R13.2 24.396,13.958 25.847,12.507 26.179,12.507 30.795,12.507 32.798,14.51 U1.31
BL: R15.2 U1.30 U3.4 | length 17.8
  L1 w0.3: U3.4 18.8,16.949 20.77,16.949 R15.2 22.296,17.006 26.295,13.007 26.386,13.007 30.533,13.007 32.766,15.24 33.83,15.24 U1.30
CH: R17.2 U1.1 U4.2 | length 20.2
  L1 w0.3: U4.2 20.181,5.461 R17.2 22.848,4.814 29.496,11.462 32.237,11.462 32.434,11.66 35.175,11.66 35.3,11.785 U1.1
CL: R19.2 U1.32 U4.4 | length 17.6
  L1 w0.3: U4.4 18.811,7.932 20.759,7.932 R19.2 24.173,11.207 27.523,11.207 28.278,11.962 31.627,11.962 33.375,13.71 U1.32
GND: C1.2 C2.1 C3.1 C4.1 C5.1 C6.1 C7.1 C8.2 C9.2 C10.2 C11.2 C12.2 C13.2 C14.2 C15.2 D1.1 D2.1 D3.1 J1.1 J2.1 MH2.1 MH3.1 MH4.1 P2.1 R9.1 R11.1 R13.1 R15.1 R17.1 R19.1 R27.2 R28.2 R29.2 T2.3 T4.3 T6.3 U1.3 U1.5 U1.21 U2.1 U2.3 U2.8 U3.1 U3.3 U3.8 U4.1 U4.3 U4.8 | length 172.1
  L1 w0.6: MH4.1 6.739,3.81 7.895,2.654 C14.2 ; v1(3.81,15.24) MH2.1 9.41,26.162 C11.2 ; v1(7.874,17.018) C13.2 ; v1(8.128,11.43) 10.3,11.43 C12.2 ; U4.8 13.262,2.486 v1(14.732,1.016) ; R15.1 22.486,15.506 22.752,15.24 v1(22.86,15.24) ; v1(25.908,17.018) 25.985,16.941 25.985,16.179 26.162,16.002 C7.1 ; D3.1 32.346,6.45 33.012,6.45 33.42,6.858 v1(33.528,6.858) ; v1(35.56,13.97) 35.661,13.97 36.569,14.878 v1(37.7,14.878) ; U1.3 36.9,14.078 v1(37.7,14.878) ; U1.21 v1(37.7,14.878) ; U1.5 38.5,14.078 v1(37.7,14.878) ; v1(41.402,25.146) 41.402,25.038 41.581,24.859 41.581,24.193 C2.1 ; v1(42.418,12.446) 42.526,12.446 43.208,11.764 J2.1 52.324,7.62 MH3.1 ; v1(50.038,15.494) D1.1
  L2 w0.6: v1(7.874,17.018) 5.588,17.018 v1(3.81,15.24) 7.543,11.507 8.051,11.507 v1(8.128,11.43) ; v1(22.86,15.24) 22.86,15.348 22.352,15.856 22.352,18.542 23.278,19.468 23.278,19.493 23.571,19.786 25.185,19.786 25.908,19.063 v1(25.908,17.018) ; T6.3 29.47,5.224 29.77,5.524 30.27,5.524 31.604,6.858 v1(33.528,6.858) 33.605,6.935 34.388,6.935 34.778,7.324 34.857,7.324 35.15,7.617 35.15,7.864 35.814,8.528 v1(35.814,8.636) 35.814,13.608 35.56,13.862 v1(35.56,13.97) ; v1(37.7,14.878) 39.986,14.878 v1(42.418,12.446) ; J1.1@39.878,27.994 J1.1 ; v1(41.402,25.146) 42.538,24.01 44.824,24.01 R27.2 R28.2 ; R29.2 R28.2 ; v1(48.006,20.066) R28.2 ; v1(50.038,15.494) 50.038,13.85 52.124,11.764 J2.1 J2.1@52.524,11.764
  L2 w3: P2.1 9.5,4.724 T2.3 10.166,4.058 12.446,1.778 19.812,1.778 ; T4.3 19.818,1.784 19.812,1.778 ; T6.3 26.524,1.778 19.812,1.778
MISO: J1.4 R3.2 U1.16 | length 14.5
  L1 w0.3: U1.16 44.202,19.31 45.72,20.828 45.72,26.216 J1.4@47.498,27.994 ; R3.2 J1.4@47.498,27.994 ; J1.4 J1.4@47.498,27.994
MOSI: J1.5 R2.2 U1.15 | length 15.6
  L1 w0.3: U1.15 44.164,18.51 46.228,20.574 46.228,24.638 46.482,24.892 49.288,24.892 R2.2 J1.5
NetC8_1: C8.1 R6.1 R7.1 Y1.1 | length 9.4
  L1 w0.3: Y1.1 37.746,2.54 38.596,3.39 C8.1 R7.1 40.9,5.848 40.9,8.642 R6.1
NetD1_2: D1.2 R2.1 | length 2
  L1 w0.3: D1.2 R2.1
NetD2_2: D2.2 R3.1 | length 2
  L1 w0.3: D2.2 R3.1
NetD3_2: D3.2 R4.1 | length 1.7
  L1 w0.3: D3.2 30.759,6.363 30.759,8.034 R4.1
NetR1_2: R1.2 U1.17 | length 1.8
  L1 w0.3: U1.17 41.018,20.828 R1.2
NetR10_1: R10.1 T1.1 | length 3.2
  L1 w0.3: v2(16.002,19.558) 16.002,19.57 R10.1
  L2 w0.3: T1.1 14.726,18.686 15.541,19.501 15.945,19.501 v2(16.002,19.558)
NetR10_2: R10.2 U2.7 | length 4.8
  L1 w0.5: U2.7 14.605,23.495 15.252,22.848 R10.2
NetR12_1: R12.1 T2.1 | length 25
  L1 w0.3: R12.1 16.752,21.856 18.034,20.574 v2(18.034,20.066)
  L2 w0.3: T2.1 14.726,5.224 16.114,6.612 16.114,18.4 17.298,19.584 17.471,19.584 17.953,20.066 v2(18.034,20.066)
NetR12_2: R12.2 U2.5 | length 3.3
  L1 w0.5: U2.5 14.605,26.035 15.131,26.561 15.131,27.565 R12.2
NetR14_1: R14.1 T3.1 | length 17.1
  L1 w0.3: R14.1 19.298,11.43 19.806,10.922 22.352,10.922 23.287,11.857 v2(26.16,11.857)
  L2 w0.3: T3.1 24.378,16.262 25.654,14.986 25.654,12.446 26.102,11.998 26.102,11.915 v2(26.16,11.857)
NetR14_2: R14.2 U3.7 | length 4
  L1 w0.5: U3.7 13.722,14.351 15.252,12.821 R14.2
NetR16_1: R16.1 T4.1 | length 19.1
  L1 w0.3: R16.1 16.758,18.536 16.758,17.532 v2(16.764,17.526)
  L2 w0.3: v2(16.764,17.526) 16.764,15.24 17.78,14.224 17.78,8.128 18.796,7.112 21.336,7.112 22.774,5.674 23.928,5.674 24.378,5.224 T4.1
NetR16_2: R16.2 U3.5 | length 2.7
  L1 w0.5: U3.5 13.722,16.891 13.772,16.941 13.772,17.062 R16.2
NetR18_1: R18.1 T5.1 | length 37
  L1 w0.3: R18.1 18.851,2.54 20.375,1.016 30.226,1.016 30.734,1.524 30.734,2.794 33.44,5.5 35.658,5.5 36.068,5.91 v2(36.068,7.112) ; v2(35.756,15.298) 35.785,15.327 35.785,17.243 v2(35.814,17.272)
  L2 w0.3: T5.1 34.132,18.288 34.798,18.288 v2(35.814,17.272) ; v2(35.756,15.298) 35.756,15.253 36.464,14.545 36.464,11.052 36.664,10.852 36.664,7.708 v2(36.068,7.112)
NetR18_2: R18.2 U4.7 | length 4
  L1 w0.5: U4.7 13.722,5.461 15.252,3.931 R18.2
NetR20_1: R20.1 T6.1 | length 24.8
  L1 w0.3: R20.1 16.752,4.626 18.338,3.04 19.058,3.04 20.32,1.778 v2(29.972,1.778)
  L2 w0.3: v2(29.972,1.778) 33.02,4.826 33.928,4.826 T6.1
NetR20_2: R20.2 U4.5 | length 2.7
  L1 w0.5: U4.5 13.722,8.001 13.772,8.051 13.772,8.172 R20.2
phaseA: R22.2 T1.3 T2.2 | length 38.1
  L2 w0.3: T1.3 10.166,18.686 12.416,20.936 37.482,20.936 R22.2
  L2 w3: T1.3 11.046,17.306 11.046,12.424 T2.2
phaseB: R24.2 T3.3 T4.2 | length 28.1
  L2 w0.3: T3.3 19.818,18.686 21.568,20.436 37.222,20.436 37.592,20.066 R24.2
  L2 w3: T3.3 19.818,15.171 20.698,14.291 20.698,12.424 T4.2
phaseC: R26.2 T5.3 T6.2 | length 18.2
  L2 w0.3: T5.3@29.47,18.686 30.72,19.936 36.742,19.936 R26.2
  L2 w3: T5.3 29.47,15.412 30.35,14.532 30.35,12.424 T6.2
PWM_IN: J2.2 U1.12 | length 10.8
  L1 w0.3: U1.12 46.374,16.11 48.26,14.224 52.284,14.224 J2.2
R\E\S\E\T\: C7.2 D4.2 R5.1 R8.2 U1.29 | length 9
  L1 w0.5: D4.2 27.234,14.423 28.912,14.423 R8.2 30.343,15.853 30.343,15.877 C7.2 ; R5.1 C7.2 ; C7.2@30.51,16.085 C7.2@30.551,16.085 ; U1.29 33.875,16.085 C7.2@30.551,16.085 ; C7.2 C7.2@30.551,16.085
R\E\S\E\T\_N: J1.2 R8.1 | length 35.3
  L1 w0.3: R8.1 29.497,13.507 26.593,13.507 25.058,15.042 25.058,17.692 26.416,19.05 29.972,19.05 30.48,18.542 32.15,18.542 32.75,19.142 32.75,20.304 37.846,25.4 37.846,28.956 38.434,29.544 41.322,29.544 42.418,28.448 J1.2
SCK22: J1.3 R1.1 | length 7.9
  L1 w0.3: R1.1 45.212,21.856 45.212,26.924 45.207,26.929 45.207,27.945 J1.3
XTAL1: R6.2 U1.7 | length 2.5
  L1 w0.3: U1.7 40.1,10.942 R6.2
XTAL2: C9.1 R7.2 U1.8 Y1.2 | length 13.7
  L1 w0.3: U1.8 40.9,11.785 42.418,10.267 42.418,5.854 R7.2 C9.1 44.716,3.39 45.566,2.54 Y1.2
pads on no net: U1.2 U1.9 U1.11 U1.19 U1.22 U1.26 U1.27 U1.28

## Polygon pours and split planes (outlines as drawn)
GND on L1 "NONET_L-01_P-001" (solid, pour order 4): 20.066,5.842 22.352,5.842 22.352,7.112 20.066,7.112 19.812,7.366 17.526,7.366 17.272,7.112 17.272,4.572 18.542,3.302 20.066,3.302 20.066,2.794 20.574,2.286 29.464,2.286 33.274,6.096 33.274,7.112 31.496,7.112 31.496,5.588 24.13,5.588 22.606,4.064 20.32,4.064 19.558,4.826 17.78,4.826 17.78,6.096 19.812,6.096
GND on L1 "NONET_L-01_P-001" (solid, pour order 5): 35.306,9.398 35.306,7.874 36.322,7.874 36.576,7.62 36.576,5.08 37.846,5.08 37.846,7.112 39.878,7.112 40.132,7.366 40.132,9.398
GND on L1 "NONET_L-01_P-001" (solid, pour order 8): 46.736,21.336 51.054,21.336 51.816,20.574 51.816,19.05 51.054,18.288 46.99,18.288 46.736,18.542
GND on L1 "NONET_L-01_P-001" (solid, pour order 7): 40.894,29.21 38.862,29.21 38.354,28.702 38.354,25.146 37.592,24.384 37.592,23.368 42.418,23.368 42.418,25.908 41.148,27.178 41.148,28.956
GND on L1 "NONET_L-01_P-001" (solid, pour order 6): 45.466,4.064 45.466,11.684 46.99,13.208 55.88,13.208 59.436,9.652 59.436,0.508 53.34,0.508 49.784,4.064
GND on L1 "NONET_L-01_P-001" (solid, pour order 2): 7.112,13.208 7.366,12.954 11.43,12.954 12.192,13.716 13.716,13.716 14.224,13.208 14.224,9.652 13.462,8.89 10.668,8.89 10.414,8.636 10.414,7.366 10.16,7.112 8.636,7.112 7.112,8.636
GND on L1 "NONET_L-01_P-001" (solid, pour order 1): 16.002,12.192 17.526,12.192 18.034,11.684 19.558,11.684 20.066,11.176 22.352,11.176 22.86,11.684 22.86,13.208 20.32,13.208 19.812,13.716 17.78,13.716 17.526,13.97 17.526,14.732 17.78,14.986 19.558,14.986 19.812,14.732 22.098,14.732 22.098,15.748 21.59,16.256 17.78,16.256 17.78,17.272 18.034,17.526 19.558,17.526 22.352,20.32 22.352,21.844 22.098,22.098 20.32,22.098 20.066,22.352 20.066,22.86 18.034,22.86 17.78,23.114 17.78,24.13 20.066,24.13 20.574,23.622 22.098,23.622 22.352,23.876 22.352,24.892 22.098,25.146 20.066,25.146 19.812,25.4 17.78,25.4 17.78,26.416 18.034,26.67 20.574,26.67 21.336,27.432 21.336,29.464 20.828,29.972 0.254,29.972 0,29.718 0,0 12.7,0 14.224,1.524 14.224,4.572 13.97,4.826 11.938,4.826 11.176,4.064 8.636,4.064 5.08,7.62 5.08,21.336 8.636,24.892 9.906,24.892 10.414,25.4 10.414,26.67 12.446,26.67 14.224,28.448 17.272,28.448 17.526,28.194 17.526,26.924 17.018,26.416 17.018,22.098 18.542,20.574 18.542,19.812 18.288,19.558 17.78,19.558 17.526,19.304 17.272,17.526 16.002,16.002
GND on L1 "NONET_L-01_P-001" (solid, pour order 0): 14.478,22.86 11.684,22.86 11.684,22.098 11.43,21.844 8.128,21.844 6.858,20.574 6.858,16.764 8.382,15.24 9.144,16.002 10.16,16.002 10.414,16.256 10.414,17.526 12.954,20.066 13.97,20.066 14.478,20.574

## Silkscreen, mask and mechanical layers (free items; w line width, h text height)
Board Outline:
  the board outline again, w0.2

## Text inside footprints (layer, text, board x,y; h text height)
J1: Top Overlay "1" at 40.386,25.908 h1 r90
J2: Top Overlay "1" at 52.87,8.218 h1 r90